# EAGLE board untitled (EAGLE 6.4)
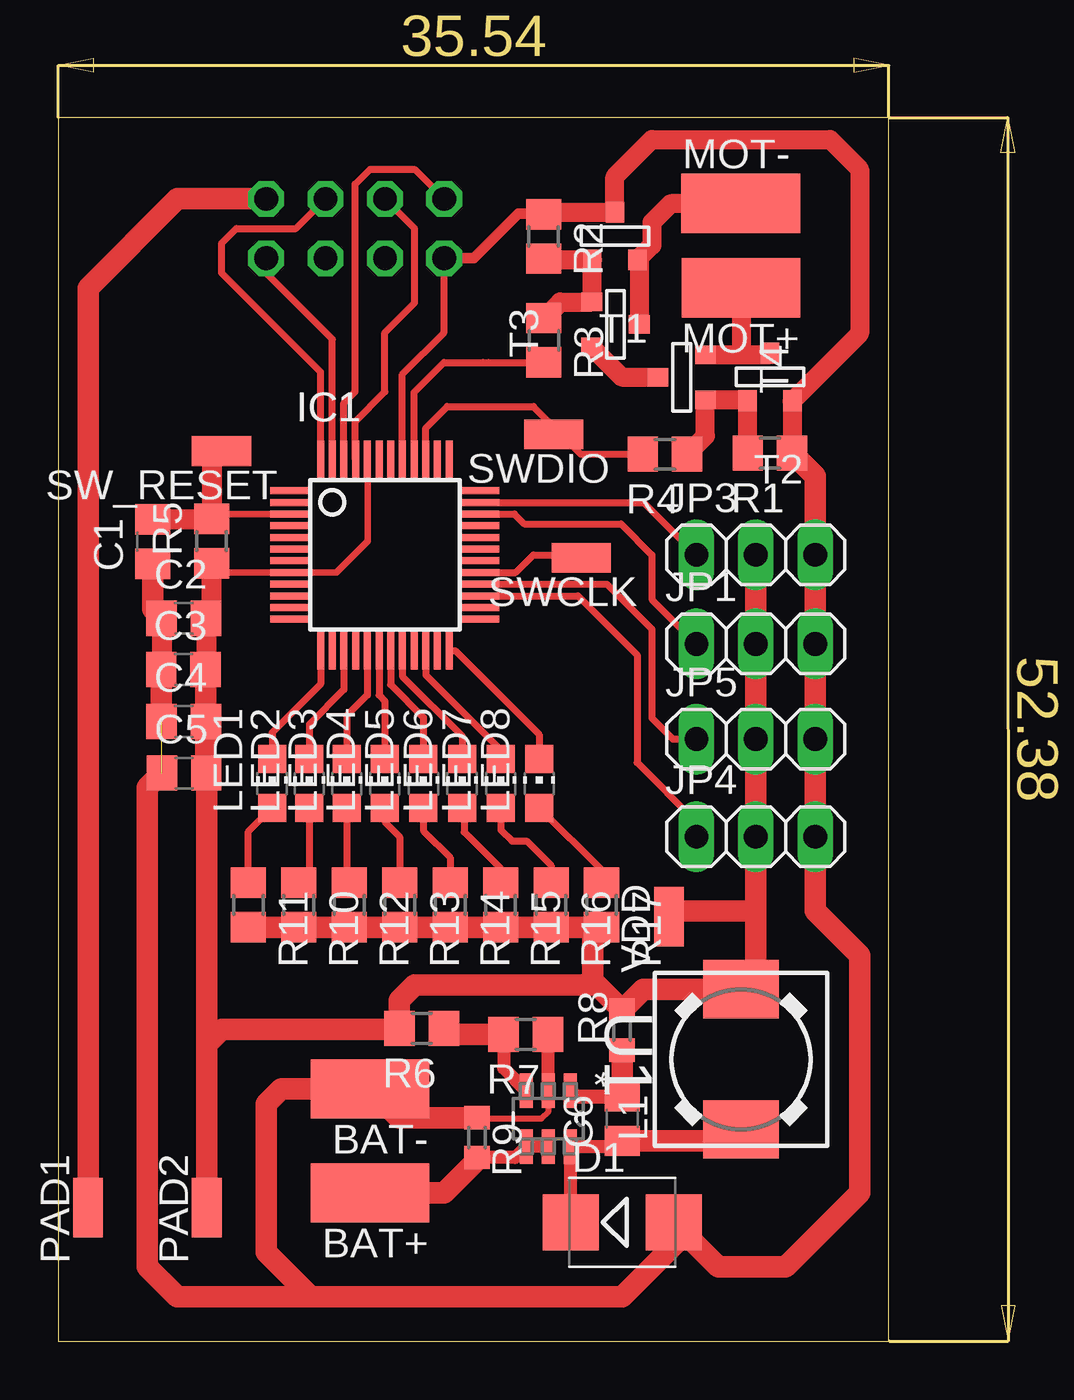
[diagram p0: board, top side]
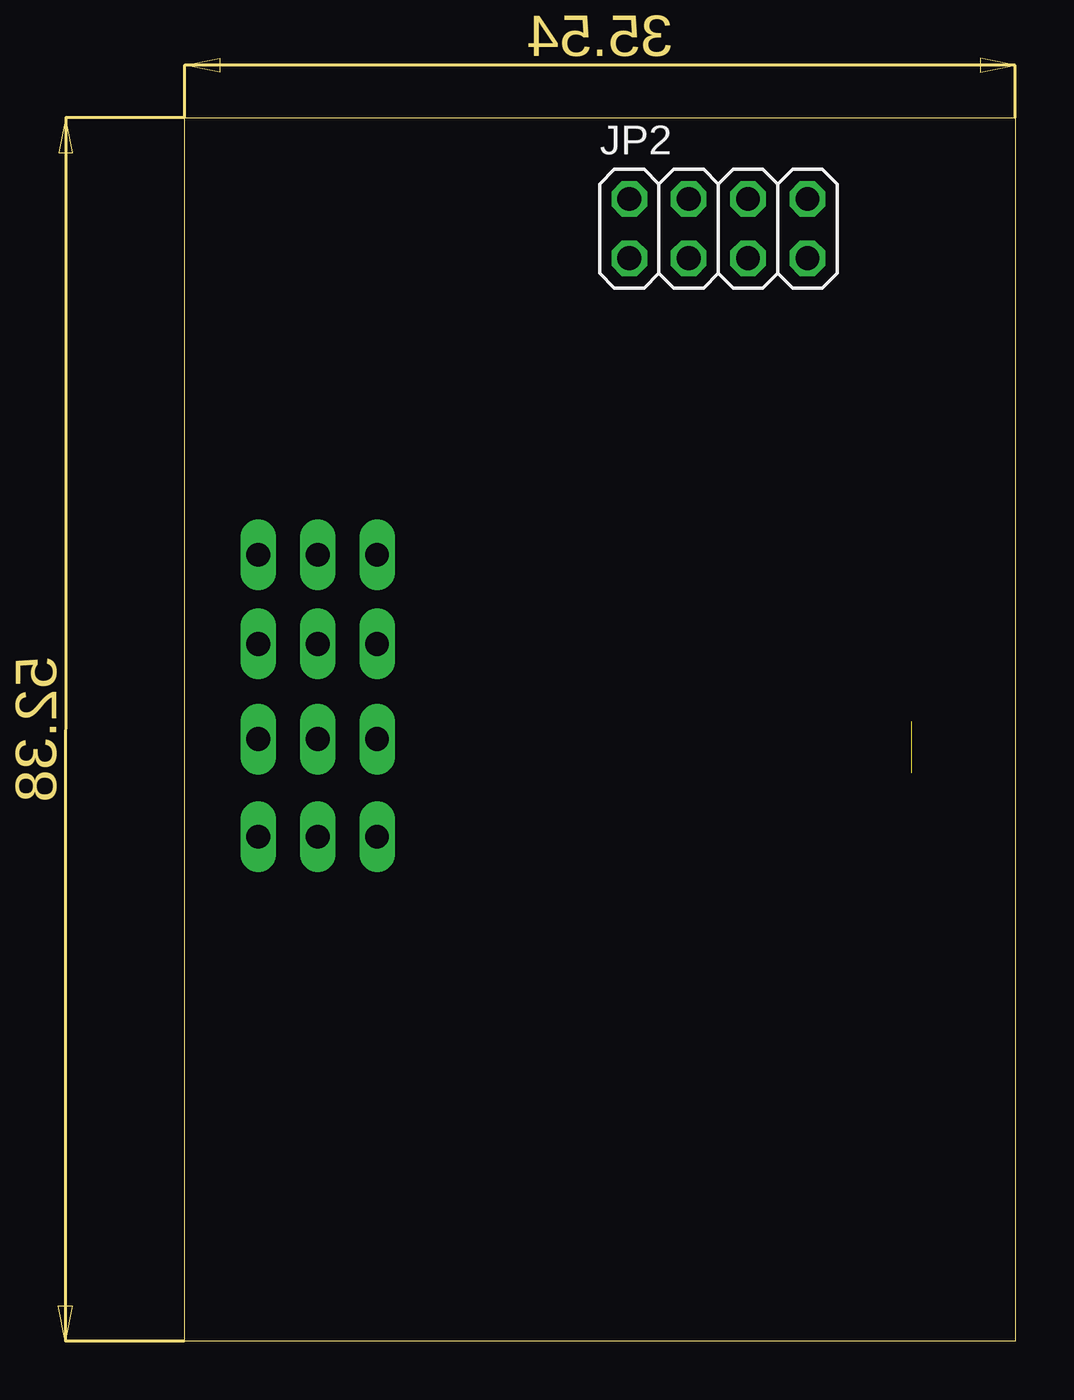
[diagram p1: board, bottom side, seen from below]

Size 35.54 x 52.38 mm. Coordinates in mm from the lower left corner, seen from the top.
Outline: 0,0 35.54,0 35.54,52.38 0,52.38 0,0
Copper layers (1*16): Top 0.035mm / dielectric 1.5mm / Bottom 0.035mm
Design rules "default": minimum track width 10mil, minimum drill 24mil, track to track 8mil, track to pad 8mil, pad to pad 8mil, via to via 8mil, smd to smd 8mil, copper to edge 40mil, drill to drill 8mil, minimum pad ring 10mil, minimum via ring 8mil, stop-mask expansion 4mil, vias tented up to drill 0mil, thermal gap 10mil

## Footprints (pad centres in the part's own frame; a part is rotated, then mirrored left to right if it is on the bottom)
SMD2,54-5,08 = smd 2.54 x 5.08: 1 0,0
C0805 = smd 1.3 x 1.5: 1 -0.95,0; 2 0.95,0
SMB = smd 2.4 x 2.4: A 2.2,0; C -2.2,0
LQFP48-7X7 = smd 0.3 x 1.6: 1 -2.75,-4.1; 2 -2.25,-4.1; 3 -1.75,-4.1; 4 -1.25,-4.1; 5 -0.75,-4.1; 6 -0.25,-4.1; 7 0.25,-4.1; 8 0.75,-4.1; 9 1.25,-4.1; 10 1.75,-4.1; 11 2.25,-4.1; 12 2.75,-4.1; 25 2.75,4.1; 26 2.25,4.1; 27 1.75,4.1; 28 1.25,4.1; 29 0.75,4.1; 30 0.25,4.1; 31 -0.25,4.1; 32 -0.75,4.1; 33 -1.25,4.1; 34 -1.75,4.1; 35 -2.25,4.1; 36 -2.75,4.1 | smd 1.6 x 0.3: 13 4.1,-2.75; 14 4.1,-2.25; 15 4.1,-1.75; 16 4.1,-1.25; 17 4.1,-0.75; 18 4.1,-0.25; 19 4.1,0.25; 20 4.1,0.75; 21 4.1,1.25; 22 4.1,1.75; 23 4.1,2.25; 24 4.1,2.75; 37 -4.1,2.75; 38 -4.1,2.25; 39 -4.1,1.75; 40 -4.1,1.25; 41 -4.1,0.75; 42 -4.1,0.25; 43 -4.1,-0.25; 44 -4.1,-0.75; 45 -4.1,-1.25; 46 -4.1,-1.75; 47 -4.1,-2.25; 48 -4.1,-2.75
1X03 = drill 1.016 long: 1 -2.54,0; 2 0,0; 3 2.54,0
2X04 = drill 1.016 octagon: 1 -3.81,-1.27; 2 -3.81,1.27; 3 -1.27,-1.27; 4 -1.27,1.27; 5 1.27,-1.27; 6 1.27,1.27; 7 3.81,-1.27; 8 3.81,1.27
DR73 = smd 2.5 x 3.25: 1 -3,0; 2 3,0
CHIP-LED0805 = smd 1.2 x 1.2: A 0,-1.05; C 0,1.05
SMD1,27-2,54 = smd 1.27 x 2.54: 1 0,0
R0805 = smd 1.3 x 1.5: 1 -0.95,0; 2 0.95,0
R0603 = smd 1 x 1.1: 1 -0.85,0; 2 0.85,0
SOT-23 = smd 0.787 x 0.889: 1 0.025,-1.016; 2 -0.94,1.016; 3 0.991,1.016
SOT95P290X145-6N = smd 1.473 x 0.559: 1 -1.194,0.94; 2 -1.194,0; 3 -1.194,-0.94; 4 1.194,-0.94; 5 1.194,0; 6 1.194,0.94

## Placement (x,y rotation side)
BAT+  [SMD2,54-5,08]  13.33,6.35 90 top
BAT-  [SMD2,54-5,08]  13.33,10.79 90 top
C1  100nF  [C0805]  4.03,34.23 90 top
C2  100nF  [C0805]  5.37,30.94 0 top
C3  100nF  [C0805]  5.35,28.75 0 top
C4  10nF  [C0805]  5.36,26.52 0 top
C5  10nF  [C0805]  5.38,24.31 0 top
C6  100n  [C0805]  24.13,9.53 90 top
D1  [SMB]  24.13,5.08 0 top
IC1  LPC1114FBD48  [LQFP48-7X7]  13.97,33.66 270 top
JP1  [1X03]  29.85,29.84 0 top
JP2  [2X04]  12.7,47.62 0 bottom
JP3  [1X03]  29.85,33.66 0 top
JP4  [1X03]  29.85,21.59 0 top
JP5  [1X03]  29.85,25.77 0 top
L1  DR73  [DR73]  29.21,12.07 90 top
LED1  [CHIP-LED0805]  9.14,23.88 0 top
LED2  [CHIP-LED0805]  10.73,23.87 0 top
LED3  [CHIP-LED0805]  12.34,23.87 0 top
LED4  [CHIP-LED0805]  13.97,23.88 0 top
LED5  [CHIP-LED0805]  15.62,23.88 0 top
LED6  [CHIP-LED0805]  17.27,23.88 0 top
LED7  [CHIP-LED0805]  18.92,23.88 0 top
LED8  [CHIP-LED0805]  20.57,23.88 0 top
MOT+  [SMD2,54-5,08]  29.21,45.09 90 top
MOT-  [SMD2,54-5,08]  29.2,48.7 270 top
PAD1  [SMD1,27-2,54]  1.27,5.71 0 top
PAD2  [SMD1,27-2,54]  6.35,5.71 0 top
R1  1k  [R0805]  30.45,38.01 180 top
R2  1k  [R0805]  20.76,47.29 270 top
R3  47k  [R0805]  20.77,42.84 270 top
R4  47k  [R0805]  25.95,37.97 180 top
R5  10k  [R0805]  6.55,34.25 90 top
R6  34k  [R0805]  15.54,13.39 180 top
R7  11k  [R0805]  20,13.13 180 top
R8  [R0603]  24.12,13.31 90 top
R9  [R0603]  17.91,8.71 270 top
R10  [R0805]  10.29,18.67 270 top
R11  [R0805]  8.13,18.67 270 top
R12  [R0805]  12.45,18.67 270 top
R13  [R0805]  14.6,18.67 270 top
R14  [R0805]  16.76,18.67 270 top
R15  [R0805]  18.92,18.67 270 top
R16  [R0805]  21.08,18.67 270 top
R17  [R0805]  23.24,18.67 270 top
SW_RESET  [SMD1,27-2,54]  6.98,38.1 90 top
SWCLK  [SMD1,27-2,54]  22.37,33.53 90 top
SWDIO  [SMD1,27-2,54]  21.19,38.81 90 top
T1  [SOT-23]  23.84,47.3 180 top
T2  [SOT-23]  30.48,41.28 180 top
T3  [SOT-23]  23.84,43.49 90 top
T4  [SOT-23]  26.67,41.28 270 top
U1  MCP16301T-I/CHY  [SOT95P290X145-6N]  20.96,9.53 270 top
VDD  [SMD1,27-2,54]  26.13,18.17 0 top

## Library data of the parts
BAT+ BAT- MOT+ MOT- PAD1 PAD2 SW_RESET SWCLK SWDIO VDD = wirepad
C1-C6 R1-R17 = rcl
D1 = diode
IC1 = lpc1xxx-v6
JP1-JP5 = pinhead
L1 = inductors
LED1-LED8 = led
T1-T4 = zetex; OC_FARNELL: unknown; OC_NEWARK: unknown
U1 = mcp1630; MPN: MCP16301T-I/CHY; OC_FARNELL: 2009288; OC_NEWARK: 58T3650; PACKAGE: SOT23-6; SUPPLIER: Microchip

## Nets
BAT+: T3.2 T4.1
ENABLE: IC1.45 JP2.4
GND: BAT-.1 C1.1 C2.1 C3.1 C4.1 C5.1 D1.A IC1.41 JP1.3 JP2.1 JP3.3 JP4.3 JP5.3 R1.1 R2.1 R7.1 R9.1 T1.1 T2.2 U1.2
GPIO0: JP2.5
GPIO2: JP2.3
LED1: IC1.13 LED1.C
LED2: IC1.14
LED3: IC1.15 LED2.C
LED4: IC1.16
LED5: IC1.17 LED3.C
LED6: IC1.18 LED4.C
LED7: IC1.19 LED5.C
LED8: IC1.20 LED6.C
LED9: IC1.21
LED10: IC1.22 LED7.C
LED11: IC1.23
LED12: IC1.24 LED8.C
MCU_RXD: IC1.46 JP2.2
MCU_TXD: IC1.47 JP2.7
N$1: R2.2 R3.1 T1.3 T3.3
N$2: R6.1 R7.2 U1.3
N$3: MOT+.1 T2.1 T4.2
N$4: MOT-.1 T1.2 T3.1
N$5: R1.2 R4.1 T2.3 T4.3
N$6: C6.1 D1.C L1.1 U1.6
N$7: JP2.8 PAD1.1
N$8: C6.2 R8.1 U1.1
N$9: BAT+.1 R9.2 U1.4 U1.5
N$10: LED1.A R11.1
N$11: LED2.A R10.1
N$12: LED3.A R12.1
N$13: LED4.A R13.1
N$14: LED5.A R14.1
N$15: LED6.A R15.1
N$16: LED7.A R16.1
N$17: LED8.A R17.1
PWM0: IC1.34 JP1.1
PWM1: IC1.35 JP3.1
PWM2: IC1.39 R4.2 SWDIO.1
PWM3: IC1.40 R3.2
PWM10: IC1.27 JP4.1
PWM11: IC1.28 JP5.1
PWM12: IC1.29 SWCLK.1
RESET: IC1.48 JP2.6
SW_RESET: C1.2 IC1.3 R5.2 SW_RESET.1
VDD: C2.2 C3.2 C4.2 C5.2 IC1.8 IC1.44 JP1.2 JP3.2 JP4.2 JP5.2 L1.2 PAD2.1 R5.1 R6.2 R8.2 R10.2 R11.2 R12.2 R13.2 R14.2 R15.2 R16.2 R17.2 VDD.1
VSSIO: IC1.5

## Tracks (layer width: path | path; a pad name or v marks a point on that pad's centre or on a via)
BAT+
  Top 0.813: T4.1 24.16,41.25 24.13,41.28 24.1,41.28 T3.2
ENABLE
  Top 0.305: IC1.45 12.7,37.78 12.7,39.37 13.97,40.64 13.97,43.18 15.24,44.45 15.24,47.62 JP2.4
GND  (1 unrouted)
  Top 0.254: U1.2 20.96,9.81 20.67,9.53 17.95,9.53 R9.1
  Top 0.305: IC1.41 14.72,41.39 16.51,43.18 JP2.1
  Top 0.457: JP2.1 17.78,46.36 19.69,48.26 20.74,48.26 R2.1
  Top 0.559: R7.1 20.95,10.73 U1.2
  Top 0.813: 31.41,38 R1.1 31.4,40.24 T2.2 34.29,43.13 34.29,50.16 33.02,51.44 25.4,51.44 23.81,49.85 T1.1 20.84,48.32 R2.1
  Top 0.864: 4.03,31.33 C2.1 4.42,28.76 C3.1
  Top 0.914: R1.1 32.38,37.03 JP3.3 JP1.3 JP5.3 JP4.3 32.38,18.41 34.29,16.51 34.29,6.35 31.11,3.18 28.24,3.18 26.82,4.59 | 4.03,31.33 C1.1 | R9.1 14.57,9.56 BAT-.1 9.53,10.79 8.89,10.16 8.89,3.81 10.79,1.91 | D1.A 26.82,4.59 | 26.82,4.59 24.13,1.91 10.79,1.91 | 4.41,24.31 C5.1 3.81,23.7 3.81,3.18 5.08,1.91 10.79,1.91 | C4.1 C3.1
LED1
  Top 0.305: IC1.13 11.22,28.12 9.14,26.05 LED1.C
LED3
  Top 0.305: IC1.15 12.22,27.89 10.73,26.4 LED2.C
LED5
  Top 0.305: IC1.17 13.22,27.66 12.34,26.77 LED3.C
LED6
  Top 0.305: IC1.18 13.72,27.65 13.97,27.4 LED4.C
LED7
  Top 0.305: IC1.19 14.22,28.1 15.62,26.7 LED5.C
LED8
  Top 0.305: IC1.20 14.72,28.46 17.27,25.91 LED6.C
LED10
  Top 0.305: IC1.22 15.72,28.51 18.92,25.3 LED7.C
LED12
  Top 0.305: IC1.24 16.98,29.55 20.57,25.97 LED8.C
MCU_RXD
  Top 0.305: IC1.46 12.22,40.16 12.7,40.64 12.7,49.53 13.33,50.16 15.24,50.16 JP2.2
MCU_TXD
  Top 0.305: IC1.47 11.72,42.89 8.89,45.72 JP2.7
N$1
  Top 0.813: R3.1 21.47,44.48 T3.3 22.82,46.26 T1.3 20.81,46.29 R2.2
N$2
  Top 0.559: R7.2 19.05,11.69 U1.3
  Top 0.914: 18.8,13.37 R7.2 16.79,13.13 R6.1
N$3
  Top 0.813: T2.1 30.38,42.22 29.21,42.22 | 29.21,42.22 T4.2 | MOT+.1 29.21,42.22
N$4
  Top 0.813: T3.1 24.85,46.21 T1.2 25.4,46.91 25.4,47.89 26.2,48.69 29.18,48.69 MOT-.1
N$5
  Top 0.813: R1.2 29.49,38.02 T2.3 29.46,40.28 T4.3 27.69,38.75 R4.1
N$6
  Top 0.559: C6.1 23.89,8.33 U1.6 21.93,8.3 D1.C
  Top 0.914: C6.1 28.72,8.58 L1.1
N$7
  Top 0.914: JP2.8 5.08,48.89 1.27,45.09 PAD1.1
N$8
  Top 0.61: U1.1 22.14,10.48 C6.2
  Top 0.914: R8.1 24.12,10.49 C6.2
N$9
  Top 0.559: U1.5 U1.4 19.55,7.86 R9.2
  Top 0.914: BAT+.1 16.51,6.35 17.91,7.75 R9.2
N$10
  Top 0.305: R11.1 8.13,21.81 LED1.A
N$11
  Top 0.305: LED2.A 10.73,20.07 R10.1
N$12
  Top 0.305: LED3.A 12.34,19.73 R12.1
N$13
  Top 0.305: LED4.A 13.97,22.23 14.6,21.59 R13.1
N$14
  Top 0.305: LED5.A 15.62,21.84 16.76,20.7 R14.1
N$15
  Top 0.305: LED6.A 17.36,22.74 17.36,21.79 18.92,20.23 R15.1
N$16
  Top 0.305: LED7.A 18.94,22.81 18.94,21.88 19.42,21.4 20.04,21.4 21.08,20.36 R16.1
N$17
  Top 0.305: LED8.A 23.24,20.16 R17.1
PWM0
  Top 0.305: IC1.34 19.52,35.41 19.94,34.98 24.08,34.98 25.4,33.66 25.4,31.75 JP1.1
PWM1
  Top 0.305: IC1.35 25.05,35.91 JP3.1
PWM2
  Top 0.305: IC1.39 15.72,39.09 16.63,40 20.32,40 21.2,39.13 SWDIO.1 21.27,38.73 21.59,38.73 22.36,37.97 R4.2
PWM3
  Top 0.305: IC1.40 15.22,40.62 16.49,41.89 18.17,41.89 18.42,41.89 R3.2
  Top 0.813: R3.2 20.79,41.88
PWM10
  Top 0.305: IC1.27 22.22,31.91 22.23,31.91 24.77,29.37 24.77,24.77 27.3,22.23 JP4.1
PWM11
  Top 0.305: IC1.28 23.47,32.41 25.4,30.48 25.4,26.67 26.3,25.77 JP5.1
PWM12
  Top 0.305: IC1.29 19.57,32.91 20.32,33.66 22.25,33.66 SWCLK.1
RESET
  Top 0.305: IC1.48 11.22,41.48 6.98,45.72 6.98,46.99 7.62,47.62 10.16,47.62 JP2.6
SW_RESET
  Top 0.279: IC1.3 7.06,35.41
  Top 0.305: 7.06,35.41 6.85,35.2 R5.2
  Top 0.864: C1.2 6.53,35.18 R5.2 6.55,37.67 SW_RESET.1
VDD
  Top 0.279: IC1.8 | IC1.8 7.06,32.91 | IC1.44 13.23,37.74 13.23,34.25 | 11.89,32.91 IC1.8
  Top 0.305: 7.06,32.91 6.66,33.3 R5.1 | 13.23,34.25 11.89,32.91
  Top 0.813: R5.1 6.32,33.06
  Top 0.864: C3.2 6.32,28.76 C2.2 6.55,31.18 R5.1
  Top 0.914: JP3.2 JP1.2 JP5.2 JP4.2 29.85,18.41 | C3.2 C4.2 6.31,24.31 C5.2 6.35,24.29 6.35,12.7 | PAD2.1 6.35,12.7 | 6.35,12.7 6.98,13.34 14.54,13.34 R6.2 14.59,14.59 15.24,15.24 22.86,15.24 | 29.85,18.41 29.85,15.24 29.67,15.07 L1.2 25.03,15.07 R8.2 23.03,15.25 23.02,15.24 22.86,15.24 | R11.2 R10.2 R12.2 R13.2 R14.2 R15.2 R16.2 R17.2 22.86,17.34 22.86,15.24 | VDD.1 26.37,18.41 29.85,18.41